# Altium PCB NXP_RFID - Team Colab.PcbDoc
Units mm, origin at the board's own origin, x right, y up, seen from the top; angles counter-clockwise.
Board outline 127 x 68.7 mm, 2 copper layers (Top Layer, Bottom Layer), stack 1.57 mm thick; 78 components, 60 nets, 220 pads, 53 vias.
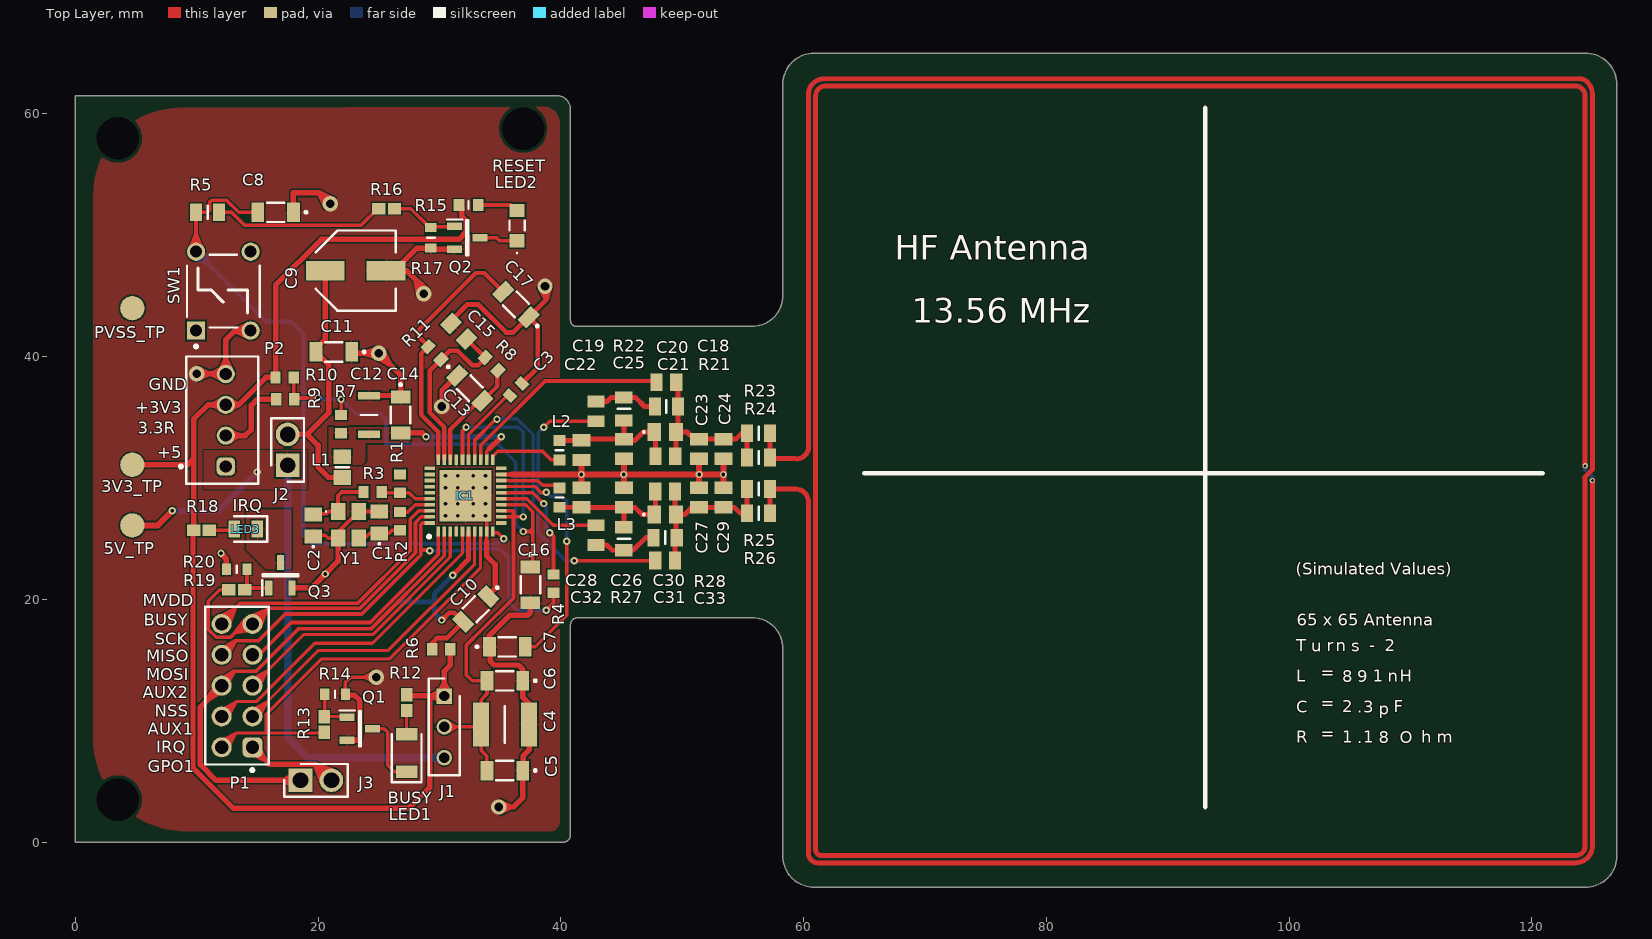
[diagram p0: Top Layer view]
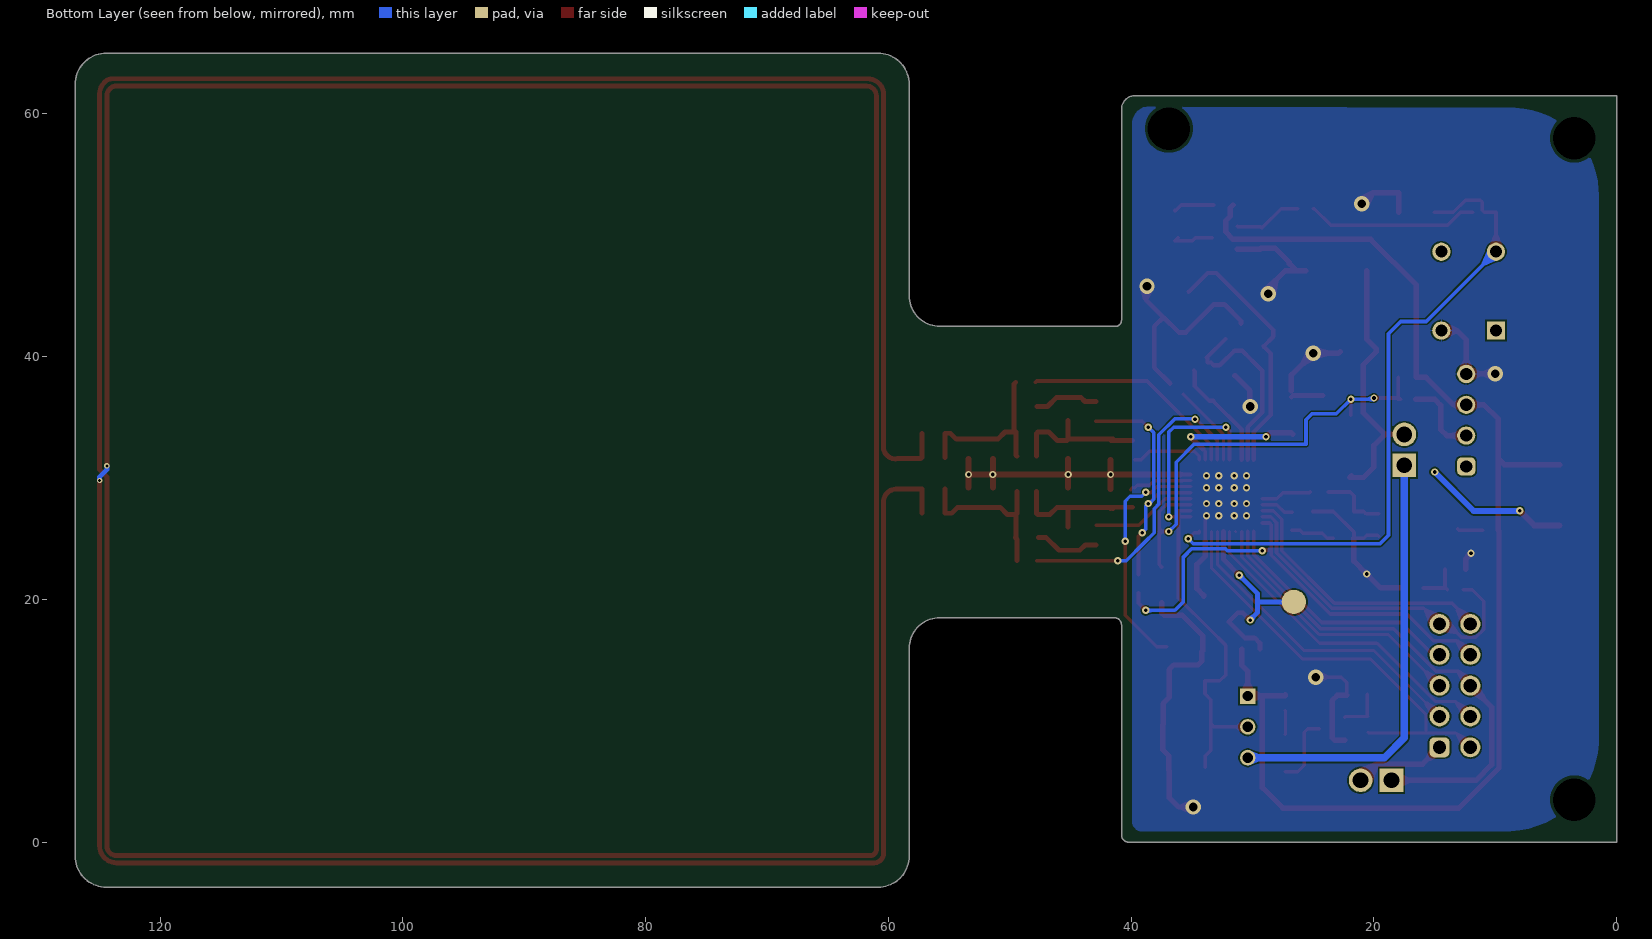
[diagram p1: Bottom Layer view, seen from below]
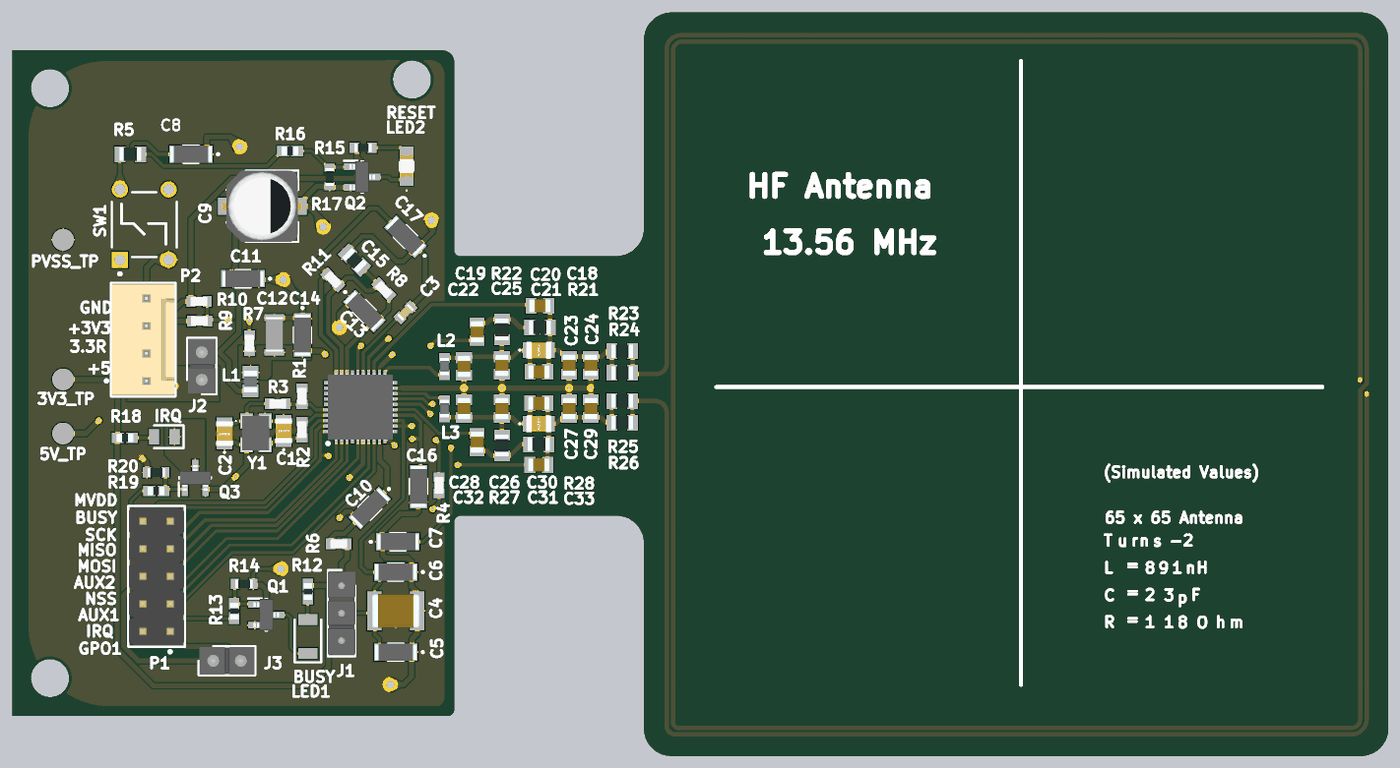
[diagram p2: 3D render of the assembled board from above, using the file's embedded part models]

## Layer stack, top to bottom
Top Solder: solder mask 0.0127, Solder Resist, Dk 3.8
Top Layer: signal copper 0.035
Dielectric: core 1.5, FR-4, Dk 4.5
Bottom Layer: signal copper 0.035
Bottom Solder: solder mask 0.0127, Solder Resist, Dk 3.8

## Board outline
39.7,61.5 cw(c39.7,60.4) 40.8,60.4 40.8,43 ccw(c41.3,43) 41.3,42.5 55.76,42.5 ccw(c55.76,45.04) 58.3,45.04 58.3,62.46 cw(c60.84,62.46) 60.84,65 124.46,65 cw(c124.46,62.46) 127,62.46 127,-1.16 cw(c124.46,-1.16) 124.46,-3.7 60.84,-3.7 cw(c60.84,-1.16) 58.3,-1.16 58.3,15.96 ccw(c55.76,15.96) 55.76,18.5 41.4,18.5 ccw(c41.4,17.9) 40.8,17.9 40.8,0.6 cw(c40.2,0.6) 40.2,0 0,0 0,61.5

## Design rules (kind name [scope] priority, off if disabled: settings)
BoardOutlineClearance [All] p1: gap=0.2 ignorepadtopadclearanceinfootprint=FALSE
Clearance [All] p1: gap=0.127 ignorepadtopadclearanceinfootprint=FALSE except(0.25: Arc-Hole Track-Hole SMDPad-Hole THPad-Hole Via-Hole Fill-Hole Poly-Hole Region-Hole Text-Hole)
ComponentClearance [All] p1: gap=0.127 collisioncheckmode=3 verticalgap=0.127 showdistances=TRUE
DiffPairsRouting [All] p1: maxlimit=0.254 minlimit=0.127 mostfreqgap=0.127 toplayer_minwidth=0.127 toplayer_maxwidth=25.4 toplayer_prefwidth=0.127 bottomlayer_minwidth=0.127 bottomlayer_maxwidth=25.4 bottomlayer_prefwidth=0.127 maxuncoupledlength=12.7
Height [All] p1: minheight=0 maxheight=1816.048 prefheight=12.7
HoleSize [All] p1: absolutevalues=TRUE maxlimit=6.3 minlimit=0.2 maxpercent=80.000 minpercent=20.000
HoleToHoleClearance [All] p1: gap=0.25 allowstackedmicrovias=FALSE
MinimumAnnularRing [All] p1: minimumring=0.076
MinimumSolderMaskSliver [All] p1: minsoldermaskwidth=0
PlaneClearance [All] p1: clearance=0.127
PlaneConnect PlaneConnectPowerPads [InPadClass('PowerPads')] p1: planeconnectstyle=Direct reliefexpansion=0.508 reliefentries=4 reliefconductorwidth=0.254 reliefairgap=0.254
PlaneConnect [All] p2: pad.planeconnectstyle=Relief pad.reliefexpansion=0.3 pad.reliefentries=4 pad.reliefconductorwidth=0.127 pad.reliefairgap=0.127 via.planeconnectstyle=Direct via.reliefexpansion=0.3 via.reliefentries=4 via.reliefconductorwidth=0.127 via.reliefairgap=0.127
PolygonConnect PolygonConnectPowerPads [All vs (InPadClass('PowerPads'))] p1: connectstyle=Direct reliefconductorwidth=0.254 reliefentries=4 polygonreliefangle="90 Angle" airgapwidth=0.254
PolygonConnect [All] p2: thpad.connectstyle=Relief thpad.reliefconductorwidth=0.127 thpad.reliefentries=4 thpad.polygonreliefangle="90 Angle" thpad.airgapwidth=0.127 smdpad.connectstyle=Relief smdpad.reliefconductorwidth=0.127 smdpad.reliefentries=4 smdpad.polygonreliefangle="90 Angle" smdpad.airgapwidth=0.127 via.connectstyle=Direct via.reliefconductorwidth=0.127 via.reliefentries=4 via.polygonreliefangle="90 Angle" via.airgapwidth=0.127
RoutingVias [All] p1: holewidth=0.3 width=0.6 viastyle="Through Hole" minholewidth=0.2 minwidth=0.2 maxholewidth=0.6 maxwidth=6.6
SilkToSilkClearance [All] p1: silktosilkclearance=0
SilkToSolderMaskClearance [IsPad] p1: minsilkscreentomaskgap=0.125 clearancetoexposedcopper=TRUE
SolderMaskExpansion [All] p1: expansion=0.075 istentingtop=FALSE
SupplyNets "Schematic Supply Nets_3" [InNet('+3V3REG')] p1: voltage=0.000
SupplyNets "Schematic Supply Nets_2" [InNet('+5')] p2: voltage=0.000
SupplyNets "Schematic Supply Nets_1" [InNet('PVSS')] p3: voltage=0.000
SupplyNets "Schematic Supply Nets" [InNet('+3V3')] p4: voltage=0.000
UnRoutedNet [All] p1: checkbadconnections=TRUE
Width [All] p1: maxlimit=25.4 minlimit=0.127 preferedwidth=0.27 minimp=50.000000 maximp=50.000000 favimp=50.000000
19 further rules are at their usual default settings.

## Classes and differential pairs
component class Designator: C1 C2 C3 C4 C5 C6 C7 C8 C9 C10 C11 C12 C13 C14 C15 C16 C17 IC1 J1 J2 J3 L1 R1 R2 R3 R4 R5 R6 R7 R8 R9 R10 R11 SW1 Y1

## Components (designator, comment, footprint, x,y, rotation, side; value= is the part's Value field where it differs from the comment)
C1 "15 pF ±1% 50V" C0805 25.05,26.35 r90 top
C2 "15 pF ±1% 50V" C0805 19.6,26.1 r90 top
C3 "0.47 µF ±5% 25V" CAPC1608X90N 36.3,37.3 r45 top
C4 "4.7 µF ±5% 50V" CAPC4532X279N 35.4,9.7 r180 top
C5 "0.1 µF ±1% 50V" GRT31x 35.4,5.9 r180 top
C6 "0.1 µF ±1% 50V" GRT31x 35.4,13.3 r180 top
C7 "0.1 µF ±1% 50V" GRT31x 35.6,16.1 r0 top
C8 "0.1 µF ±1% 50V" GRT31x 16.5,51.9 r180 top
C9 "100µF 25V" EEHZA1E101XP 23.1,47.1 r0 top
C10 "0.1 µF ±1% 50V" GRT31x 33,19.2 r225 top
C11 "0.1 µF ±1% 50V" GRT31x 21.3,40.4 r180 top
C12 "6.8 µF ±10% 50V" CAPC3216X180N 24.2,35.2 r270 top
C13 "0.1 µF ±1% 50V" GRT31x 32.5,37.4 r315 top
C14 "0.1 µF ±1% 50V" GRT31x 26.8,35.2 r270 top
C15 "1 µF ±5% 50V" RESC2012X140N 31.6,42.1 r315 top
C16 "0.1 µF ±1% 50V" GRT31x 37.5,21.2 r270 top
C17 "0.1 µF ±1% 50V" GRT31x 36.3,44.3 r135 top
C18 "82 pF ±1% 50V" CAPC2012X94N_1 48.7,37.9 r0 top
C19 "1 nF ±1% 50V" CAPC2012X90N 42.9,35.5 r90 top
C20 "15 pF ±1% 50V" C0805 48.6,33.8 r0 top
C21 "18 pF ±1% 50V" CAPC2012X94N_2 48.61,31.8 r0 top
C22 "220 pF ±1% 50V" CAPC2012X94N_3 41.7,32.3 r90 top
C23 "120 pF 50V" CAPC2012X94N_5 51.4,32.4 r90 top
C24 "82 pF ±1% 50V" CAPC2012X94N_1 53.4,32.4 r90 top
C25 "33 pF ±1% 100V" CAPC2012X94N_4 45.2,32.39 r90 top
C26 "33 pF ±1% 100V" CAPC2012X94N_4 45.2,28.4 r90 top
C27 "120 pF 50V" CAPC2012X94N_5 51.4,28.4 r90 top
C28 "220 pF ±1% 50V" CAPC2012X94N_3 41.7,28.4 r90 top
C29 "82 pF ±1% 50V" CAPC2012X94N_1 53.4,28.4 r90 top
C30 "18 pF ±1% 50V" CAPC2012X94N_2 48.6,28.9 r0 top
C31 "15 pF ±1% 50V" C0805 48.6,27 r0 top
C32 "1 nF ±1% 50V" CAPC2012X90N 42.9,25.3 r270 top
C33 "82 pF ±1% 50V" CAPC2012X94N_1 48.6,23.2 r0 top
IC1 "PN5180A0HN_C3Y" QFN50P600X600X100-41N-D 32.15,28.55 r90 top
J1 "3pin header" HDRV3W64P0X254_1X3_762X254X864P 30.4,12.04 r270 top
J2 "2pin header" HDRV2W110P0X254_1X2_508X254X854P 17.5,31.06 r90 top
J3 "2pin header" HDRV2W110P0X254_1X2_508X254X854P 18.56,5.1 r0 top
L1 "22 nH" INDC2012X115N 22,30.9 r90 top
L2 "470 nH" INDC1608X95N 39.9,32.3 r90 top
L3 "470 nH" INDC1608X95N 39.9,28.4 r270 top
LED1 "LED_orange" LEDC3216X120N 27.3,7.35 r90 top
LED2 "LED_yellow" LTSTC171KSKT 36.4,50.8 r90 top
LED3 "LED_green" LEDC2012X90N 14.05,25.8 r180 top
P1 "61301021121" 61301021121 13.33,12.9 r90 top locked
P2 "61900411121" 61900411121 12.1,34.77 r270 top
Q1 "BC817" SOT96P237X111-3N 23.45,9.345 r0 top
Q2 "BC817" SOT96P237X111-3N 32.3,49.8 r0 top
Q3 "BC817" SOT96P237X111-3N 16.9,22 r90 top
R1 "D.N.P." RESC1608X50N_DNP 26.75,29.55 r90 top
R2 "0R  0.33W" RESC1608X50N_1 26.75,26.45 r90 top
R3 "0R  0.33W" RESC1608X50N_1 24.5,28.85 r0 top
R4 "D.N.P." RESC1608X50N_DNP 39.4,21.3 r90 top
R5 "2k7 0.5W" RESC2012X60N 10.9,51.9 r180 top
R6 "0R  0.33W" RESC1608X50N_1 30.15,15.9 r180 top
R7 "D.N.P." RESC1608X50N_DNP 21.9,34.45 r270 top
R8 "0R  0.33W" RESC1608X50N_1 34.3,39.4 r315 top
R9 "D.N.P." RESC1608X50N_DNP 17.3,36.5 r180 top
R10 "D.N.P." RESC1608X50N_DNP 17.25,38.3 r180 top
R11 "0R  0.33W" RESC1608X50N_1 29.6,40.3 r135 top
R12 "1k 0.5W" RESC1608X58N 27.3,11.5 r270 top
R13 "1k 0.5W" RESC1608X58N 20.5,9.7 r270 top
R14 "4k7 0.4W" RESC1608X55N_1 21.4,12.2 r180 top
R15 "470Ohm" RESC1608X55N 32.4,52.5 r0 top
R16 "1k 0.5W" RESC1608X58N 25.65,52.2 r180 top
R17 "4k7 0.4W" RESC1608X55N_1 29.3,49.8 r90 top
R18 "1k 0.5W" RESC1608X58N 10.4,25.7 r0 top
R19 "1k 0.5W" RESC1608X58N 13.3,20.8 r180 top
R20 "4k7 0.4W" RESC1608X55N_1 13.3,22.5 r0 top
R21 "D.N.P" RESC2012X60N_1 48.7,35.9 r180 top
R22 "4k7 0.5W" RESC2012X60N_1 45.2,35.7 r90 top
R23 "2R2 0.5W" RESC2012X60N_2 56.3,33.7 r0 top
R24 "2R2 0.5W" RESC2012X60N_2 56.3,31.7 r0 top
R25 "2R2 0.5W" RESC2012X60N_2 56.3,29.1 r0 top
R26 "2R2 0.5W" RESC2012X60N_2 56.3,27.1 r0 top
R27 "4k7 0.5W" RESC2012X60N_1 45.2,25 r90 top
R28 "D.N.P" RESC2012X60N_1 48.6,25.1 r180 top
SW1 "push_button" TECO-1825910-6_V 12.2,45.4 r90 top
Y1 "27.12MHz" 7M27120MEEQT 22.5,26.15 r270 top

## Footprints (in the part's own frame and the unit in brackets; to place one, negate y for a bottom-side part, rotate by r counter-clockwise, add the part's x,y. Pads: shape width x height; smd on the part's side, far side on the other; paste and mask are expansions set on the pad)
7M27120MEEQT [mm]
  rect 1.4x1.2 smd: 1(-1.1,-0.85) 2(1.1,-0.85) 3(1.1,0.85) 4(-1.1,0.85)
  silkscreen extent -1.15,-1.9 -1.05,-1.8, body extent -1.68,-1.33 1.68,1.33, height 0.9
61301021121 [mm] "Pin Header, pitch 2.54 mm, THT, Vertical, dual row, 10p"
  rrect50% 1.65x1.65 hole 1.1: 1(-5.08,-1.27)
  round 1.65 hole 1.1: 2(-5.08,1.27) 3(-2.54,-1.27) 4(-2.54,1.27) 5(0,-1.27) 6(0,1.27) 7(2.54,-1.27) 8(2.54,1.27) 9(5.08,-1.27) 10(5.08,1.27)
  silkscreen extent -7.08,-2.61 6.5,2.61, body extent -6.35,-2.54 6.35,2.54, height 8.59
61900411121 [mm] "2.54mm Male Locking Header, 4p"
  rrect50% 1.5x1.5 hole 1: 1(3.81,0.3)
  round 1.5 hole 1: 2(1.27,0.3) 3(-1.27,0.3) 4(-3.81,0.3)
  silkscreen extent -5.25,-3.52 5.25,2.97, body extent -5.08,-2.9 5.08,2.9, height 11.53
C0805 [mm]
  rect 1.15x1.45 smd: 1(-0.9,0) 2(0.9,0)
  silkscreen extent -1.8,-0.05 -1.7,0.05, body extent -1.15,-0.78 1.15,0.77, height 0.98
CAPC1608X90N [mm]
  rect 0.78x0.99 smd: 1(-0.7,0) 2(0.7,0)
  body extent -0.76,-0.38 0.76,0.38, height 0.91
CAPC2012X90N [mm]
  rect 0.96x1.39 smd: 1(-0.81,0) 2(0.81,0)
  body extent -1,-0.63 1,0.63, height 0.9
CAPC2012X94N_1 [mm]
  rect 1.02x1.47 smd: 1(-0.81,0) 2(0.81,0)
  body extent -1,-0.63 1,0.63, height 0.94
CAPC2012X94N_2 [mm]
  rect 1.02x1.47 smd: 1(-0.81,0) 2(0.81,0)
  body extent -1,-0.63 1,0.63, height 0.94
CAPC2012X94N_3 [mm]
  rect 1.02x1.47 smd: 1(-0.81,0) 2(0.81,0)
  body extent -1,-0.63 1,0.63, height 0.94
CAPC2012X94N_4 [mm]
  rect 1.02x1.47 smd: 1(-0.81,0) 2(0.81,0)
  body extent -1,-0.63 1,0.63, height 0.94
CAPC2012X94N_5 [mm]
  rect 1.02x1.47 smd: 1(-0.81,0) 2(0.81,0)
  body extent -1,-0.63 1,0.63, height 0.94
CAPC3216X180N [mm]
  rect 0.62x1.82 smd: 1(-1.6,0) 2(1.6,0)
  silkscreen extent 0,-0.7 0,0.7, body extent -1.65,-0.8 1.55,0.8, height 1.6
CAPC4532X279N [mm]
  rect 1.34x3.61 smd: 1(-1.98,0) 2(1.98,0)
  silkscreen extent 0,-1.5 0,1.5, body extent -2.25,-1.6 2.25,1.6, height 2.79
EEHZA1E101XP [mm]
  rect 3.2x1.6 smd: 1(-2.5,0) 2(2.5,0)
  silkscreen extent -4.88,-3.3 3.3,3.3, body extent -3.68,-3.3 3.62,3.3, height 5.8
GRT31x [mm]
  rect 1.05x1.6 smd: 1(-1.475,0) 2(1.475,0)
  silkscreen extent -2.6,-0.8 0.7,0.8, body extent -1.9,-0.8 1.9,0.8, height 1.35
HDRV2W110P0X254_1X2_508X254X854P [mm]
  rect 1.95x1.95 hole 1.3: 1(0,0)
  round 1.95 hole 1.3: 2(2.54,0)
  silkscreen extent -1.34,-1.35 3.89,1.34, body extent -1.27,-1.27 3.81,1.27, height 8.54
HDRV3W64P0X254_1X3_762X254X864P [mm]
  rect 1.275x1.275 hole 0.85: 1(0,0)
  round 1.275 hole 0.85: 2(2.54,0) 3(5.08,0)
  silkscreen extent -1.44,-1.27 6.53,1.27, body extent -1.27,-1.27 6.35,1.27, height 8.64
INDC1608X95N [mm]
  rect 0.9x1 smd: 1(-0.8,0) 2(0.8,0)
  silkscreen extent 0,-0.3 0,0.3, body extent -0.8,-0.4 0.8,0.4, height 0.95
INDC2012X115N [mm]
  rect 1.2x1.45 smd: 1(-0.85,0) 2(0.85,0)
  silkscreen extent 0,-0.53 0,0.53, body extent -1,-0.63 1,0.63, height 1.15
LEDC2012X90N [mm]
  rect 0.95x1.4 smd: 1(-0.95,0) 2(0.95,0)
  silkscreen extent -1.77,-1.05 0.95,1.05
LEDC3216X120N [mm]
  rect 1x1.75 smd: 1(-1.55,0) 2(1.55,0)
  silkscreen extent -2.4,-1.23 1.55,1.22
LTSTC171KSKT [mm]
  rect 1.1x1.25 smd: 1(-1.25,0) 2(1.25,0)
  silkscreen extent -2.3,-0.63 0.4,0.62, body extent -1,-0.63 1,0.63, height 0.79
QFN50P600X600X100-41N-D [mm]
  rect 0.85x0.3 smd: 1(-2.95,2.25) 2(-2.95,1.75) 3(-2.95,1.25) 4(-2.95,0.75) 5(-2.95,0.25) 6(-2.95,-0.25) 7(-2.95,-0.75) 8(-2.95,-1.25) 9(-2.95,-1.75) 10(-2.95,-2.25) 21(2.95,-2.25) 22(2.95,-1.75) 23(2.95,-1.25) 24(2.95,-0.75) 25(2.95,-0.25) 26(2.95,0.25) 27(2.95,0.75) 28(2.95,1.25) 29(2.95,1.75) 30(2.95,2.25)
  rect 0.3x0.85 smd: 11(-2.25,-2.95) 12(-1.75,-2.95) 13(-1.25,-2.95) 14(-0.75,-2.95) 15(-0.25,-2.95) 16(0.25,-2.95) 17(0.75,-2.95) 18(1.25,-2.95) 19(1.75,-2.95) 20(2.25,-2.95) 31(2.25,2.95) 32(1.75,2.95) 33(1.25,2.95) 34(0.75,2.95) 35(0.25,2.95) 36(-0.25,2.95) 37(-0.75,2.95) 38(-1.25,2.95) 39(-1.75,2.95) 40(-2.25,2.95)
  rect 4.25x4.25 smd: 41(0,0)
  silkscreen extent -3.5,2.87 -3.25,3.12, body extent -3.05,-3.05 3.05,3.05, height 1
RESC1608X50N_1 [mm]
  rect 0.85x1 smd: 1(-0.75,0) 2(0.75,0)
  body extent -0.77,-0.43 0.78,0.42, height 0.45
RESC1608X50N_DNP [mm]
  rect 0.85x1 smd: 1(-0.75,0) 2(0.75,0)
  body extent -0.77,-0.43 0.78,0.42, height 0.45
RESC1608X55N [mm]
  rect 0.9x0.95 smd: 1(-0.8,0) 2(0.8,0)
  silkscreen extent 0,-0.3 0,0.3, body extent -0.8,-0.4 0.8,0.4, height 0.55
RESC1608X55N_1 [mm]
  rect 0.75x0.95 smd: 1(-0.85,0) 2(0.85,0)
  silkscreen extent 0,-0.3 0,0.3, body extent -0.8,-0.4 0.8,0.4, height 0.55
RESC1608X58N [mm]
  rect 1.1x0.95 smd: 1(-0.65,0) 2(0.65,0)
  body extent -0.77,-0.4 0.77,0.4, height 0.58
RESC2012X60N [mm]
  rect 1x1.45 smd: 1(-0.95,0) 2(0.95,0)
  silkscreen extent 0,-0.53 0,0.53, body extent -1,-0.63 1,0.63, height 0.6
RESC2012X60N_1 [mm]
  rect 1x1.45 smd: 1(-0.95,0) 2(0.95,0)
  silkscreen extent 0,-0.53 0,0.52, body extent -1,-0.63 1,0.63, height 0.6
RESC2012X60N_2 [mm]
  rect 1x1.45 smd: 1(-0.95,0) 2(0.95,0)
  silkscreen extent 0,-0.53 0,0.53, body extent -1,-0.63 1,0.63, height 0.6
RESC2012X140N [mm]
  rect 1.15x1.45 smd: 1(-0.9,0) 2(0.9,0)
  body extent -1,-0.63 1,0.63, height 1.4
SOT96P237X111-3N [mm]
  rect 1.25x0.6 smd: 1(-1.05,0.955) 2(-1.05,-0.955) 3(1.05,0)
  silkscreen extent -1.67,-1.46 0.08,1.5, body extent -1.18,-1.46 1.18,1.46, height 1.11
TECO-1825910-6_V [mm] "Switch, 4-Leads, Body 5.99x5.99mm"
  rect 1.5x1.5 hole 0.99: 1(-3.25,2.25)
  round 1.5 hole 0.99: 2(3.25,2.25) 3(-3.25,-2.25) 4(3.25,-2.25)
  silkscreen extent -4.67,-3 3,3, body extent -3,-2.99 2.99,3, height 5

## Part data
C1 C2 C20 C31: library part 15pF, "15 pF ±1% 50V Ceramic Capacitor C0G, NP0 0805 (2012 Metric)", Manufacturer_Name=KEMET, Manufacturer_Part_Number=C0805C150F5GACTU, Mouser Part Number=80-C0805C150F5GACTU, Datasheet Link=https://content.kemet.com/datasheets/KEM_C1003_C0G_SMD.pdf, Height=1.1mm, Mouser Price/Stock=https://www.mouser.com/Search/Refine.aspx?Keyword=80-C0805C150F5GACTU
C3: library part 470nF, "0.47 µF ±5% 25V Ceramic Capacitor X7R 0603 (1608 Metric)", Manufacturer_Name="Kyocera AVX", Manufacturer_Part_Number=06033C474JAT2A, Mouser Part Number=581-06033C474JAT2A, Datasheet Link=https://componentsearchengine.com/Datasheets/1/06031A100FAT2A.pdf, Height=0.9mm, Mouser Price/Stock=https://www.mouser.com/Search/Refine.aspx?Keyword=581-06033C474JAT2A
C4: library part 4.7uF, "4.7 µF ±5% 50V Ceramic Capacitor X7R 1812 (4532 Metric)", Arrow Part Number=18125C475JAT2A, Manufacturer_Name="Kyocera AVX", Mouser Part Number=581-18125C475JAT2A, Arrow Price/Stock=https://www.arrow.com/en/products/18125c475jat2a/avx, Datasheet Link=https://datasheets.kyocera-avx.com/X7RDielectric.pdf, Height=2.79mm, Manufacturer_Part_Number=18125C475JAT2A, Mouser Price/Stock=https://www.mouser.com/Search/Refine.aspx?Keyword=581-18125C475JAT2A
C5 C6 C7 C8 C10 C11 C13 C14 C16 C17: library part 100nF, "0.1 µF ±1% 50V Ceramic Capacitor C0G, NP0 1206 (3216 Metric)", Arrow Part Number=GRT31C5C1H104FA02L, Manufacturer_Name="Murata Electronics", Mouser Part Number=81-GRT31C5C1H104FA2L, Arrow Price/Stock=https://www.arrow.com/en/products/grt31c5c1h104fa02l/murata-manufacturing?region=nac, Datasheet Link=https://search.murata.co.jp/Ceramy/image/img/A01X/G101/ENG/GRT31C5C1H104FA02-01A.pdf, Height=1.25mm, Manufacturer_Part_Number=GRT31C5C1H104FA02L, Mouser Price/Stock=https://www.mouser.co.uk/ProductDetail/Murata-Electronics/GRT31C5C1H104FA02L?qs=xZ%2FP%252Ba9zWqakAIIZeEzSxA%3D%3D
C9: library part 100µF, "Capacitor Polarised. Aluminum Organic Polymer Capacitors 100uF 25volt AEC-Q200", Manufacturer_Name=Panasonic, Manufacturer_Part_Number=EEH-ZA1E101XP, Mouser Part Number=667-EEH-ZA1E101XP, Datasheet Link=http://industrial.panasonic.com/cdbs/www-data/pdf/RDD0000/ABA0000C1221.pdf, Height=8.3mm, Mouser Price/Stock=https://www.mouser.co.uk/ProductDetail/Panasonic/EEH-ZA1E101XP?qs=7UCyOFMWVHbBL6OBgRrCPQ%3D%3D
C12: library part 6.8uF, "6.8 µF ±10% 50V Ceramic Capacitor X5R 1206 (3216 Metric)", Arrow Part Number=C3216X5R1H685K160AB, Manufacturer_Name=TDK, Mouser Part Number=810-C3216X5R1H685K, Arrow Price/Stock=https://www.arrow.com/en/products/c3216x5r1h685k160ab/tdk, Datasheet Link=https://product.tdk.com/info/en/catalog/datasheets/mlcc_commercial_midvoltage_en.pdf, Height=1.8mm, Manufacturer_Part_Number=C3216X5R1H685K160AB, Mouser Price/Stock=https://www.mouser.co.uk/ProductDetail/TDK/C3216X5R1H685K160AB?qs=LcTL%2F5vFEzHV52DL6DPbFg%3D%3D
C15: library part 1uF, "1 µF ±5% 50V Ceramic Capacitor X7R 0805 (2012 Metric)", Arrow Part Number=08055C105JAT2A, Manufacturer_Name="Kyocera AVX", Mouser Part Number=581-08055C105JAT2A, Arrow Price/Stock=https://www.arrow.com/en/products/08055c105jat2a/avx, Datasheet Link=https://componentsearchengine.com/Datasheets/1/08055C105JAT2A.pdf, Height=1.4mm, Manufacturer_Part_Number=08055C105JAT2A, Mouser Price/Stock=https://www.mouser.co.uk/ProductDetail/KYOCERA-AVX/08055C105JAT2A?qs=tIBUQlZETBw4JiKO8J7C1w%3D%3D
C18 C24 C29 C33: library part 82pF, "82 pF ±1% 50V Ceramic Capacitor C0G, NP0 0805 (2012 Metric)", Manufacturer_Name="Kyocera AVX", Manufacturer_Part_Number=08055A820FAT2A, Mouser Part Number=581-08055A820FAT2A, Datasheet Link=https://www.mouser.com/datasheet/2/40/C0GNP0_Dielectric-951274.pdf, Height=0.94mm, Mouser Price/Stock=https://www.mouser.co.uk/ProductDetail/Kyocera-AVX/08055A820FAT2A?qs=PcWMbIuZCscXY%2FuloG0yJQ%3D%3D
C19 C32: library part 1nF, "1 nF ±1% 50V Ceramic Capacitor C0G, NP0 0805 (2012 Metric)", Arrow Part Number=VJ0805A102FXACW1BC, Manufacturer_Name=Vishay, Mouser Part Number=77-VJ0805A102FXACBC, Arrow Price/Stock=https://www.arrow.com/en/products/vj0805a102fxacw1bc/vishay, Datasheet Link=https://www.arrow.com/en/products/vj0805a102fxacw1bc/vishay, Height=0.9mm, Manufacturer_Part_Number=VJ0805A102FXACW1BC, Mouser Price/Stock=https://www.mouser.com/Search/Refine.aspx?Keyword=77-VJ0805A102FXACBC
C21 C30: library part 18pF, "18 pF ±1% 50V Ceramic Capacitor C0G, NP0 0805 (2012 Metric)", Manufacturer_Name="Kyocera AVX", Manufacturer_Part_Number=08055A180FAT2A, Mouser Part Number=581-08055A180FAT2A, Datasheet Link=https://4donline.ihs.com/images/VipMasterIC/IC/AVXC/AVXC-S-A0014478390/AVXC-S-A0014712186-1.pdf?hkey=EF798316E3902B6ED9A73243A3159BB0, Height=0.94mm, Mouser Price/Stock=https://www.mouser.com/Search/Refine.aspx?Keyword=581-08055A180FAT2A
C22 C28: library part 220pF, "220 pF ±1% 50V Ceramic Capacitor C0G, NP0 0805 (2012 Metric)", Manufacturer_Name="Kyocera AVX", Manufacturer_Part_Number=08055A221FAT2A, Mouser Part Number=581-08055A221FAT2A, Datasheet Link=https://www.mouser.com/datasheet/2/40/C0GNP0_Dielectric-951274.pdf, Height=0.94mm, Mouser Price/Stock=https://www.mouser.co.uk/ProductDetail/AVX/08055A221FAT2A?qs=owscpGBW86VBfJF%2FIHQR%252BQ%3D%3D
C23 C27: library part 120pF, "120 pF ±1% 50V Ceramic Capacitor C0G, NP0 0805 (2012 Metric)", Manufacturer_Name="Kyocera AVX", Manufacturer_Part_Number=08055A121FAT2A, Mouser Part Number=581-08055A121F, Datasheet Link=https://componentsearchengine.com/Datasheets/1/08055A121FAT2A.pdf, Height=0.94mm, Mouser Price/Stock=https://www.mouser.com/Search/Refine.aspx?Keyword=581-08055A121F
C25 C26: library part 33pF, "33 pF ±1% 100V Ceramic Capacitor C0G, NP0 0805 (2012 Metric)", Arrow Part Number=08051A330FAT2A, Manufacturer_Name="Kyocera AVX", Mouser Part Number=581-08051A330F, Arrow Price/Stock=https://www.arrow.com/en/products/08051a330fat2a/avx, Datasheet Link=https://spicat.kyocera-avx.com/product/mlcc/chartview/08051A330FAT2A/DataSheet/NP0c, Height=0.94mm, Manufacturer_Part_Number=08051A330FAT2A, Mouser Price/Stock=https://www.mouser.co.uk/ProductDetail/AVX/08051A330FAT2A?qs=xS%252BL8w1%252B7NBUjm7pwPIlOg%3D%3D
IC1: "RF Front End High-Performance Multi-protocol Full NFC Forum-compliant Frontend PN5180A0HN/C3Y", Arrow Part Number=PN5180A0HN/C3Y, Manufacturer_Name=NXP, Mouser Part Number=771-PN5180A0HN/C3Y, Arrow Price/Stock=https://www.arrow.com/en/products/pn5180a0hnc3y/nxp-semiconductors?utm_currency=USD&region=nac, Datasheet Link=https://datasheet.datasheetarchive.com/originals/distributors/DKDS-31/606841.pdf, Height=1mm, Manufacturer_Part_Number=PN5180A0HN/C3Y, Mouser Price/Stock=https://www.mouser.co.uk/ProductDetail/NXP-Semiconductors/PN5180A0HN-C3Y?qs=1mbolxNpo8fIXIFwLHRV2A%3D%3D
J1: "Connector Header Through Hole 3 position 0.100\" (2.54mm)", Manufacturer_Name=Harwin, Manufacturer_Part_Number=M20-9990345, Mouser Part Number=855-M20-9990345, Datasheet Link=https://cdn.harwin.com/pdfs/M20-999.pdf, Height=8.64mm, Mouser Price/Stock=https://www.mouser.co.uk/ProductDetail/Harwin/M20-9990345?qs=ulE8k0yEMYbl6ZPCtNdmpA%3D%3D
J2 J3: "Connector Header Through Hole 2 position 0.100\" (2.54mm)", Manufacturer_Name="Wurth Elektronik", Manufacturer_Part_Number=61300211121, Mouser Part Number=710-61300211121, Datasheet Link=https://componentsearchengine.com/Datasheets/2/61300211121.pdf, Height=8.54mm, Mouser Price/Stock=https://www.mouser.co.uk/ProductDetail/Wurth-Elektronik/61300211121?qs=t4813l51qx%252B1A5GYDQxPlw%3D%3D
L1: library part 22nH, "22 nH Unshielded Multilayer Inductor 300 mA 500mOhm Max 0805 (2012 Metric)", Arrow Part Number=AIMC-0805-22NJ-T, Manufacturer_Name=ABRACON, Mouser Part Number=815-AIMC-0805-22NJT, Arrow Price/Stock=https://www.arrow.com/en/products/aimc-0805-22nj-t/abracon, Datasheet Link=https://abracon.com/Magnetics/new/AIMC-0805.pdf, Height=1.15mm, Manufacturer_Part_Number=AIMC-0805-22NJ-T, Mouser Price/Stock=https://www.mouser.com/Search/Refine.aspx?Keyword=815-AIMC-0805-22NJT
L2 L3: library part 470nH, "470 nH Shielded Multilayer Inductor 400 mA 494mOhm Max 0603 (1608 Metric)", Arrow Part Number=MLJ1608WR47JT000, Manufacturer_Name=TDK, Mouser Part Number=810-MLJ1608WR47JT000, Arrow Price/Stock=https://www.arrow.com/en/products/mlj1608wr47jt000/tdk?region=nac, Datasheet Link=https://product.tdk.com/system/files/dam/doc/product/inductor/inductor/smd/catalog/inductor_commercial_standard_mlj1608_en.pdf, Height=0.95mm, Manufacturer_Part_Number=MLJ1608WR47JT000, Mouser Price/Stock=https://www.mouser.co.uk/ProductDetail/TDK/MLJ1608WR47JT000?qs=XFe3dyCRgQg9kpQbVd6YyA%3D%3D
LED1: "LED", Arrow Part Number=LTST-C150KAKT, Manufacturer_Name=Lite-On, Mouser Part Number=859-LTST-C150KAKT, Arrow Price/Stock=https://www.arrow.com/en/products/ltst-c150kakt/lite-on-technology?region=nac, Datasheet Link=http://media.digikey.com/pdf/Data%20Sheets/Lite-On%20PDFs/LTST-C150KAKT.pdf, Height=1.2mm, Manufacturer_Part_Number=LTST-C150KAKT, Mouser Price/Stock=https://www.mouser.co.uk/ProductDetail/Lite-On/LTST-C150KAKT?qs=Z3CaLxJiOJI8YYCkdyNq2A%3D%3D
LED2: "LED", Arrow Part Number=LTST-C171KSKT, Manufacturer_Name=Lite-On, Mouser Part Number=859-LTST-C171KSKT, Arrow Price/Stock=https://www.arrow.com/en/products/ltst-c171kskt/lite-on-technology?utm_currency=USD&region=nac, Datasheet Link=https://optoelectronics.liteon.com/upload/download/DS22-2000-110/LTST-C171KSKT.pdf, Height=0.9mm, Manufacturer_Part_Number=LTST-C171KSKT, Mouser Price/Stock=https://www.mouser.co.uk/ProductDetail/LITEON/LTST-C171KSKT?qs=llMtm9xcdM0CwR1bByTaUQ%3D%3D
LED3: "LED", Arrow Part Number=LTST-C171KGKT, Manufacturer_Name=Lite-On, Mouser Part Number=859-LTST-C171KGKT, Arrow Price/Stock=https://www.arrow.com/en/products/ltst-c171kgkt/lite-on-technology?region=nac, Datasheet Link=https://optoelectronics.liteon.com/upload/download/DS22-2000-118/LTST-C171KGKT.pdf, Height=0.9mm, Manufacturer_Part_Number=LTST-C171KGKT, Mouser Price/Stock=https://www.mouser.co.uk/ProductDetail/LITEON/LTST-C171KGKT?qs=j1zysehuyChA38z%2F%252BFfUSw%3D%3D
P1: library part CMP-1502-01084-3, Color=Black, Contact Resistance=20mΩ, Current Rating=3A, Flammability Rating="UL94 V-0", Insulation Resistance=1GΩ, Max Operating Temperature=105°C, Min Operating Temperature=-40°C, Operating Supply Voltage=250V, Connector Type="Male Pin", Contact Gender=Male, Contact Material=Copper, Contact Mating Length=5.9944mm, Contact Plating=Gold, Gender=Male, Height=2.54mm, Housing Material=PBT, Insulation=Insulated, Lead Pitch=2.54mm, Length=12.7mm, Mount="Through Hole", NexarPartId=18818163, Number of Contacts=10, Number of Pins=10, Number of Positions=10, Number of Rows=2, Orientation=Vertical, Packaging=Bulk, Pitch=2.54mm, REACH SVHC=Unknown, RoHS=Compliant, Row Spacing=2.54mm, Termination="Through Hole", Voltage Rating=250V, Width=12.7mm
P2: library part CMP-1502-00586-2, Color=Beige, Contact Resistance=20mΩ, Current Rating=3A, Flammability Rating="UL94 V-0", Insulation Resistance=1GΩ, Max Operating Temperature=105°C, Min Operating Temperature=-40°C, Operating Supply Voltage=250V, Connector Type="Male Pin", Contact Gender=Male, Contact Material=Copper, Contact Mating Length=7.493mm, Contact Plating=Tin, Fastening Type=Friction, Gender=Male, Height=3.3mm, Housing Material=Nylon, Insulation=Insulated, Lead Free="Lead Free", Lead Pitch=2.54mm, Length=10.16mm, Mount="Through Hole", NexarPartId=18818226, Number of Contacts=4, Number of Pins=4, Number of Positions=4, Number of Rows=1, Orientation=Vertical, Packaging=Bulk, Pitch=2.54mm, REACH SVHC=Unknown, RoHS=Compliant, Termination="Through Hole", Voltage Rating=250V, Width=10.2mm
Q1 Q2 Q3: "Bipolar (BJT) Transistor NPN 80 V 500 mA 100MHz 225 mW Surface Mount SOT-23-3 (TO-236)", Manufacturer_Name=onsemi, Manufacturer_Part_Number=SMMBTA06LT3G, Mouser Part Number=863-SMMBTA06LT3G, Datasheet Link=https://www.onsemi.com/pub/Collateral/MMBTA05LT1-D.PDF, Height=1.11mm, Mouser Price/Stock=https://www.mouser.co.uk/ProductDetail/onsemi/SMMBTA06LT3G?qs=uarJZ6H%252BeNrtzNKN%252B1EKYg%3D%3D
R1 R4 R7 R9 R10: library part DNP, "Thick Film Resistors - SMD D11/CRCW0603 0R0 ET2 e3", Arrow Part Number=CRCW06030000Z0EI, Manufacturer_Name=Vishay, Mouser Part Number=71-CRCW06030000Z0EI, Arrow Price/Stock=https://www.arrow.com/en/products/crcw06030000z0ei/vishay?utm_currency=USD&region=nac, Datasheet Link=http://www.vishay.com/docs/20035/dcrcwe3.pdf, Height=0.5mm, Manufacturer_Part_Number=CRCW06030000Z0EI, Mouser Price/Stock=https://www.mouser.co.uk/ProductDetail/Vishay-Dale/CRCW06030000Z0EI?qs=%252B6g0mu59x7L7KQG%252Bwwt0jQ%3D%3D
R2 R3 R6 R8 R11: library part 0R, "Thick Film Resistors - SMD D11/CRCW0603 0R0 ET2 e3", Arrow Part Number=CRCW06030000Z0EI, Manufacturer_Name=Vishay, Mouser Part Number=71-CRCW06030000Z0EI, Arrow Price/Stock=https://www.arrow.com/en/products/crcw06030000z0ei/vishay?utm_currency=USD&region=nac, Datasheet Link=http://www.vishay.com/docs/20035/dcrcwe3.pdf, Height=0.5mm, Manufacturer_Part_Number=CRCW06030000Z0EI, Mouser Price/Stock=https://www.mouser.co.uk/ProductDetail/Vishay-Dale/CRCW06030000Z0EI?qs=%252B6g0mu59x7L7KQG%252Bwwt0jQ%3D%3D
R5: library part 2k7Ohm, "2.7 kOhms ±1% 0.5W, 1/2W Chip Resistor 0805 (2012 Metric) Automotive AEC-Q200, Pulse Withstanding Thick Film", Arrow Part Number=CRCW08052K70FKEAHP, Manufacturer_Name=Vishay, Mouser Part Number=71-CRCW08052K70FKEAH, Arrow Price/Stock=https://www.arrow.com/en/products/crcw08052k70fkeahp/vishay?region=nac, Datasheet Link=https://componentsearchengine.com/Datasheets/1/CRCW08051R00FKEAHP.pdf, Height=0.6mm, Manufacturer_Part_Number=CRCW08052K70FKEAHP, Mouser Price/Stock=https://www.mouser.co.uk/ProductDetail/Vishay-Dale/CRCW08052K70FKEAHP?qs=40TFAHZMFvcOgTEige8g9Q%3D%3D
R12 R13 R16 R18 R19: library part 1kOhm, "1 kOhms ±0.1% 0.5W, 1/2W Chip Resistor 0603 (1608 Metric) Thin Film", Manufacturer_Name="TE Connectivity", Manufacturer_Part_Number=RA73F1J1K0BTDF, Mouser Part Number=279-RA73F1J1K0BTDF, Datasheet Link=https://www.te.com/commerce/DocumentDelivery/DDEController?Action=srchrtrv&DocNm=1773270-3&DocType=Data%20Sheet&DocLang=English&PartCntxt=2-2176474-6&DocFormat=pdf, Height=0.58mm, Mouser Price/Stock=https://www.mouser.co.uk/ProductDetail/TE-Connectivity-Holsworthy/RA73F1J1K0BTDF?qs=Li%252BoUPsLEnve%2FJ8%252BWostNg%3D%3D
R14 R17 R20: library part 4k7Ohm_0603, "4.7 kOhms ±1% 0.4W Chip Resistor 0603 (1608 Metric) Automotive AEC-Q200, Pulse Withstanding Thick Film", Manufacturer_Name="ROHM Semiconductor", Manufacturer_Part_Number=SDR03EZPF4701, Mouser Part Number=755-SDR03EZPF4701, Height=0.55mm, Mouser Price/Stock=https://www.mouser.co.uk/ProductDetail/ROHM-Semiconductor/SDR03EZPF4701?qs=byeeYqUIh0OpNXtQCyPv7A%3D%3D
R15: "SMD 0603 470ohm 1% Anti Surge AEC-Q200", Arrow Part Number=ESR03EZPF4700, Manufacturer_Name="ROHM Semiconductor", Mouser Part Number=755-ESR03EZPF4700, Arrow Price/Stock=https://www.arrow.com/en/products/esr03ezpf4700/rohm-semiconductor?region=nac, Datasheet Link=https://componentsearchengine.com/Datasheets/2/ESR03EZPF4700.pdf, Height=0.55mm, Manufacturer_Part_Number=ESR03EZPF4700, Mouser Price/Stock=https://www.mouser.co.uk/ProductDetail/ROHM-Semiconductor/ESR03EZPF4700?qs=DyUWGjl%252BcVsZQGp8SgvEfA%3D%3D
R21 R22 R27 R28: library part 4k7Ohm_0805, "4.7 kOhms ±1% 0.5W, 1/2W Chip Resistor 0805 (2012 Metric) Automotive AEC-Q200, Pulse Withstanding Thick Film", Arrow Part Number=CRCW08054K70FKEAHP, Manufacturer_Name=Vishay, Mouser Part Number=71-CRCW08054K70FKEAH, Arrow Price/Stock=https://www.arrow.com/en/products/crcw08054k70fkeahp/vishay?utm_currency=USD&region=nac, Datasheet Link=https://componentsearchengine.com/Datasheets/1/CRCW08051R00FKEAHP.pdf, Height=0.6mm, Manufacturer_Part_Number=CRCW08054K70FKEAHP, Mouser Price/Stock=https://www.mouser.co.uk/ProductDetail/Vishay-Dale/CRCW08054K70FKEAHP?qs=k2%2FDWSARqgEa%252B2IrxOkJMA%3D%3D
R23 R24 R25 R26: library part 2.2Ohm, "2.2 Ohms ±1% 0.5W, 1/2W Chip Resistor 0805 (2012 Metric) Automotive AEC-Q200, Pulse Withstanding Thick Film", Arrow Part Number=CRCW08052R20FKEAHP, Manufacturer_Name=Vishay, Mouser Part Number=71-CRCW08052R20FKEAH, Arrow Price/Stock=https://www.arrow.com/en/products/crcw08052r20fkeahp/vishay?utm_currency=USD&region=nac, Datasheet Link=https://componentsearchengine.com/Datasheets/1/CRCW08051R00FKEAHP.pdf, Height=0.6mm, Manufacturer_Part_Number=CRCW08052R20FKEAHP, Mouser Price/Stock=https://www.mouser.co.uk/ProductDetail/Vishay-Dale/CRCW08052R20FKEAHP?qs=40TFAHZMFvc8altFjF5kRw%3D%3D
SW1: library part CMP-1684-00021-1, "Tact Switch, SPST-NO, 0.05 A, -35 to 85 degC, 4-Pin THD, RoHS, Bulk", Actuator Color=Black, Contact Rating @ Voltage=0.05A@24VDC, Dielectric Strength=500VAC, Manufacturer="TE Connectivity", Maximum AC Voltage Rating=N/A, Maximum Contact Resistance=100mOhm, Maximum DC Voltage Rating=24V, Minimum Insulation Resistance=100MOhm, Operating Temperature=-35to85C, Package Description="4-Pin Through Hole Device, Body 5.99 x 5.99 mm, Pitch 6.5 mm", Package Reference=THD, Part No=1825910-6, Actuator Length=1.4mm, Actuator Material=PolybutyleneTerephthalate, Actuator Style=RoundButton, Base Material=N/A, Body Orientation=Straight, Bushing Type=Unthreaded, Contact Material=CopperAlloy, Contact Plating=Silver, Datasheet URL=http://www.te.com/commerce/DocumentDelivery/DDEController?Action=showdoc&DocId=Customer+Drawing%7F1825910%7FC9%7Fpdf%7FEnglish%7FENG_CD_1825910_C9.pdf%7F1825910-6, Datasheet Version="Rev. C9", Dimension=5.99x5mm, Electrical Life=100000Cycles, Family=1825910, Function=MomentaryContact, Housing Material=N/A, Illumination=N/R, Manufacturer URL=http://www.te.com, Mechanical Life=100000Cycles, Mounting=ThroughHole, Packaging=N/A, Pole Throw Configuration=SPST, Product Weight=N/A, RoHS=Yes, Seal Description=N/A, Seal Location=N/A, Switch Configuration=OFF(ON), Terminal Type=PCPins, Thread Size=N/R
Y1: "27.12 MHz ±10ppm Crystal 10pF 50 Ohms 4-SMD, No Lead", Arrow Part Number=7M-27.120MEEQ-T, Manufacturer_Name="TXC CORPORATION", Mouser Part Number=717-7M-27.120MEEQ-T, Arrow Price/Stock=https://www.arrow.com/en/products/7m-27.120meeq-t/txc-corporation?region=europe, Datasheet Link=http://www.txccrystal.com/images/pdf/7m-accuracy.pdf, Height=0.8mm, Manufacturer_Part_Number=7M-27.120MEEQ-T, Mouser Price/Stock=https://www.mouser.co.uk/ProductDetail/TXC-Corporation/7M-27.120MEEQ-T?qs=65dIHZNch5vpCedHjSv71Q%3D%3D

## Free pads (board coordinates)
  round 1.524 hole 3.5 unplated: 7(3.5,3.5) 7(3.5,58) 7(36.9,58.8)
  round 2 smd: 8(4.7,26.1) 8(4.7,31.1) 8(4.7,44)
  round 2 smd far side: 8(26.6,19.8)

## Via types
v1: diameter 0.6, hole 0.3, Top Layer to Bottom Layer, 43 vias
v2: diameter 1.27, hole 0.711, Top Layer to Bottom Layer, 8 vias
v3: diameter 0.45, hole 0.25, Top Layer to Bottom Layer, 2 vias

## Nets (pads, with @x,y where several pads share a name; then routed paths per layer and width w, separated by ;. In a path a pad name is that pad's centre, name@x,y a point inside that pad or via, vN(x,y) a via of type N, cw(c..) or ccw(c..) an arc to the next point about the centre after c; other vN are vias at no path point)
+3V3: J1.1 P2.3 pad.8@4.7,31.1 R6.1 R10.2 R12.1 R15.1 R18.1 | length 106.2
  Top Layer w0.45: pad.8@4.7,31.1 9.256,31.1 9.756,31.6 ; R18.1 9.7,25.65 9.7,6.1 13,2.8 27.5,2.8 29.2,4.5 29.2,12.05 ; R18.1@9.756,25.7 9.756,31.6 ; R12.1 27.3,12.05 29.2,12.05 ; R6.1 30.9,14.6 30.4,14.1 J1.1 30.39,12.05 29.2,12.05 ; R15.1 31.825,52.275 31.825,51.603 32.227,51.201 32.227,50.309 31.595,49.677 20.279,49.677 16.5,45.898 R10.2 15.7,38.3 13.44,36.04 P2.3 10.94,36.04 9.756,34.856 9.756,31.6
+3V3REG: P2.2 R9.2 | length 6.6
  Top Layer w0.45: P2.2 14,33.5 14.5,34 14.5,36 15,36.5 R9.2
+5: J1.3 J2.1 P2.1 pad.8@4.7,26.1 | length 48.2
  Top Layer w0.5: pad.8@4.7,26.1 6.8,26.1 v1(8,27.3)
  Bottom Layer w0.5: v1(8,27.3) 11.8,27.3 v1(15,30.5)
  Bottom Layer w0.6: J2.1 17.5,8.6 19.14,6.96 J1.3
ANT1: C18.1 IC1.23 | length 17.9
  Top Layer w0.3: IC1.23 33.4,32.7 38.7,38 47.79,38 C18.1
ANT2: C33.1 IC1.24 | length 26.7
  Top Layer w0.3: IC1.24 32.9,33.1 34.6,34.8 34.742,34.8 v1(34.742,34.858) ; v1(41.1,23.2) C33.1
  Bottom Layer w0.3: v1(34.742,34.858) 34.8,34.8 34.9,34.9 36.4,34.9 37.723,33.577 37.723,28.073 37.723,27.861 38.1,27.484 38.1,25.816 38.1,25.5 38.9,24.7 40.4,23.2 v1(41.1,23.2)
AUX1: IC1.40 P1.8 R4.1 | length 39.5
  Top Layer w0.3: P1.8 13.22,16.6 15.1,16.6 17.3,18.8 23.607,18.8 28.227,23.42 28.227,23.427 28.454,23.654 28.454,24.1 ; v1(29.2,24.023) 29.143,24.08 28.597,24.08 28.578,24.1 28.454,24.1 ; IC1.40 28.6,26.3 28.454,26.154 28.454,24.1 ; v1(38.8,19.1) 39.4,19.7 R4.1
  Bottom Layer w0.3: v1(29.2,24.023) 32.079,24.023 32.229,24.173 35.027,24.173 35.7,23.5 35.7,19.8 36.4,19.1 v1(38.8,19.1)
AUX2: IC1.2 J3.1 P1.6 | length 40.7
  Top Layer w0.3: P1.6@12.1,13.1 13.1,14.1 14.9,14.1 18.4,17.6 24.4,17.6 30.4,23.6 IC1.2
  Top Layer w0.45: P1.6 10.3,11.14 10.3,6.4 11.6,5.1 J3.1
AVDD: C13.2 IC1.28 R8.2 | length 9.2
  Top Layer w0.36: IC1.28 30.9,34 33.257,36.357 C13.2 34.777,37.591 34.777,38.817 R8.2
BUSY: IC1.8 P1.2 R13.2 | length 36.2
  Top Layer w0.26: P1.2 13.24,9 ; 15.7,9.002 15.7,10.5 20.3,15.1 25.9,15.1 33.4,22.6 IC1.8
  Top Layer w0.27: 13.24,9 13.242,9 15.1,9 ; 15.102,9.002 15.7,9.002 16.002,9.002 16.1,9.002 ; 16.1,9 20.45,9 R13.2
CLK1: IC1.36 R1.1 R3.2 | length 4.2
  Top Layer w0.3: R3.2 25.3,28.8 R1.1 27.5,28.8 28,28.3 IC1.36
CLK2: IC1.37 R2.2 | length 2.7
  Top Layer w0.3: R2.2 27.4,27.2 28,27.8 IC1.37
DVDD: C17.2 IC1.30 R11.2 | length 21.4
  Top Layer w0.36: IC1.30 29.9,33.8 28.499,35.201 28.499,40.26 R11.2 29.07,40.88 28.3,41.65 28.3,42.2 33,46.9 33.7,46.9 C17.2
GPO1: IC1.38 P1.10 | length 22.7
  Top Layer w0.3: P1.10@11.9,18 11.97,18.07 13.6,19.7 23.286,19.7 27.6,24.014 27.6,26.6 28.3,27.3 IC1.38
IRQ: IC1.39 P1.9 R19.2 | length 28.5
  Top Layer w0.3: R19.2 11.9,20.8 10.958,19.858 10.958,17.524 11.604,16.878 12.694,16.878 12.716,16.9 12.8,16.9 13.88,17.98 P1.9 15.893,19.273 23.463,19.273 28.027,23.837 28.027,26.331 28.423,26.727 28.427,26.727 28.5,26.8 IC1.39
MCU_CLK: R1.2
MISO: IC1.5 P1.4 | length 27.2
  Top Layer w0.26: P1.4 13.3,11.6 14.953,11.6 19.653,16.3 19.74,16.387 24.487,16.387 31.9,23.8 IC1.5
MOSI: IC1.3 P1.5 | length 22.8
  Top Layer w0.26: P1.5 18.8,17.1 24.5,17.1 30.9,23.5 IC1.3
MVDD: J3.2 P1.1 | length 7.6
  Top Layer w0.45: P1.1 15.993,6.427 19.773,6.427 J3.2
N.C_1: IC1.11
N.C_1*: C16.1 IC1.14 R7.1 R9.1 R10.1 | length 39.3
  Top Layer w0.3: R10.1 18,36.7 17.8,36.5 R9.1 18.15,36.6 v1(20,36.6) ; R7.1 v1(21.9,36.5) ; IC1.14 37.117,27.8 37.7,27.217 37.7,25.6 ; v1(36.9,25.6) 37.7,25.6 ; C16.1 37.7,22.875 37.7,25.6
  Bottom Layer w0.3: v1(20,36.6) 20.1,36.5 v1(21.9,36.5) 23.1,35.3 25.1,35.3 25.6,34.8 25.6,32.8 34.8,32.8 36.3,31.3 36.3,26.2 v1(36.9,25.6)
N.C_2: IC1.20
N.C_2*: IC1.31
N.C_3: IC1.32
N.C_4: IC1.33
N.C_5: IC1.34
N.C_6: IC1.35
NetC1_1: C1.1 R2.1 Y1.3 | length 3.7
  Top Layer w0.3: Y1.3 23.85,25.05 24.25,25.45 C1.1 25.85,25.45 26.1,25.7 R2.1
NetC2_2: C2.2 R3.1 Y1.1 | length 5.7
  Top Layer w0.3: C2.2@19.6,27.05 20.65,27.05 20.85,27.25 Y1.1 21.65,28.55 21.95,28.85 R3.1
NetC9_1: C9.1 C11.2 J2.2 L1.1 | length 22.2
  Top Layer w0.45: J2.2 19.1,33.6 ; C9.1 20.6,41.45 19.825,40.675 C11.2 20.9,39.325 20.9,35.4 19.1,33.6 ; L1.1@21.85,30.2 L1.1 20.85,30.05 20,30.9 20,32.7 19.1,33.6
NetC18_2: C18.2 C20.2 C21.2 C23.2 C24.2 R21.1 R23.1 R24.1 | length 14.5
  Top Layer w0.4: C21.2 49.5,31.88 C20.2 C20.2@49.65,33.8 ; C18.2 49.65,37.76 R21.1 C20.2@49.65,33.8 ; R24.1 R23.1 54.9,33.7 54.41,33.21 C24.2 C23.2 50.99,33.21 50.4,33.8 C20.2@49.65,33.8
NetC19_2: C19.2 R21.2 R22.2 | length 5.3
  Top Layer w0.4: C19.2 43.81,36.31 44.15,36.65 R22.2 46.15,36.65 46.9,35.9 R21.2
NetC20_1: C20.1 C21.1 C22.2 C25.2 L2.2 R22.1 | length 12.1
  Top Layer w0.4: L2.2 C22.2@41.69,33.1 ; C22.2@41.39,33.1 41.5,33.21 45.19,33.21 C25.2 ; R22.1 C25.2 ; C21.1 47.8,33.7 C20.1 46.8,33.8 46.1,33.1 45.3,33.1 C25.2
NetC26_1: C26.1 C28.1 C30.1 C31.1 L3.2 R27.2 | length 12
  Top Layer w0.4: L3.2 41.59,27.6 C28.1@41.7,27.49 ; C28.1@41.5,27.49 41.5,27.59 C28.1 C26.1 ; R27.2 C26.1 ; C30.1 47.79,27.09 C31.1 46.7,27 46.11,27.59 C26.1
NetC27_1: C27.1 C29.1 C30.2 C31.2 C33.2 R25.1 R26.1 R28.1 | length 14.1
  Top Layer w0.4: C33.2 49.41,24.96 R28.1 49.5,25.15 C31.2 ; C30.2 49.41,27.09 C31.2 ; R25.1 R26.1 54.8,27.1 54.31,27.59 C29.1 C27.1 50.79,27.59 50.2,27 C31.2
NetC32_2: C32.2 R27.1 R28.2 | length 5.4
  Top Layer w0.4: C32.2 43.79,24.49 44.23,24.05 R27.1 45.95,24.05 47,25.1 R28.2
NetLED1_1: LED1.1 Q1.3 | length 5.9
  Top Layer w0.27: Q1.3 25.456,9.345 25.735,9.066 25.735,6.333 26.269,5.8 LED1.1
NetLED1_2: LED1.2 R12.2 | length 2
  Top Layer w0.27: LED1.2 27.285,8.9 27.285,10.85 R12.2
NetLED2_1: LED2.1 Q2.3 | length 3.5
  Top Layer w0.3: Q2.3 34.7,49.8 34.95,49.55 LED2.1 LED2.1@36.15,49.8
NetLED2_2: LED2.2 R15.2 | length 3.4
  Top Layer w0.3: R15.2 35.875,52.5 36.325,52.05 LED2.2
NetLED3_1: LED3.1 Q3.3
NetLED3_2: LED3.2 R18.2 | length 2.2
  Top Layer w0.3: R18.2@11.125,25.7 R18.2 13,25.7 LED3.2
NetQ1_1: Q1.1 R13.1 R14.2 | length 3.8
  Top Layer w0.27: R14.2 20.55,10.4 R13.1 22.35,10.35 Q1.1
NetQ2_1: Q2.1 R16.1 R17.2 | length 5.6
  Top Layer w0.3: R16.1 27.65,52.2 29.2,50.65 R17.2 29.352,50.703 31.198,50.703 Q2.1
NetQ3_1: Q3.1 R19.1 R20.2 | length 3.6
  Top Layer w0.3: R19.1 R19.1@14.1,20.95 ; R20.2 14.15,21 R19.1@14.1,20.95 ; Q3.1 R19.1@14.1,20.95
NetR23_2: R23.2 R24.2 R25.2 R26.2 | length 516.3
  Top Layer w0.4: R26.2 R25.2 59.4,29.1 ; R23.2 R24.2 57.35,31.6 59.257,31.6 ; 60.394,-0.894 ccw(c61.2,-0.894) 61.2,-1.7 123.6,-1.7 ccw(c123.6,-0.3) 125,-0.3 v3(125,29.8) ; 60.4,32.4 60.4,61.6 cw(c61.7,61.6) 61.7,62.9 124,62.9 cw(c124,62.176) 124.512,62.688 cw(c123.644,61.646) 125,61.646 125,30.7 124.4,30.1 124.4,-0.3 cw(c123.6,-0.3) 123.6,-1.1 61.548,-1.1 ; 61,-0.658 61,61.5 cw(c61.8,61.5) 61.8,62.3 123.6,62.3 cw(c123.6,61.5) 124.4,61.5 v3(124.4,31)
  Top Layer w0.406: 59.257,31.6 ccw(c59.429,32.571) 60.4,32.4 ; 59.4,29.1 cw(c59.35,28.05) 60.4,28 60.4,-0.9 ; 61,-0.658 ccw(c61.495,-0.605) 61.548,-1.1
  Bottom Layer w0.4: v3(124.4,31) 124.4,30.7 125,30.1 v3(125,29.8)
NSS: IC1.1 P1.7 | length 20.6
  Top Layer w0.3: P1.7 15.14,15.44 17.8,18.1 24.296,18.1 29.9,23.704 IC1.1
PVDD: C10.2 IC1.6 pad.8@26.6,19.8 R6.2 | length 17.8
  Top Layer w0.4: R6.2 29.4,16.4 29.839,16.839 30.639,16.839 C10.2 31.214,18.9 30.8,18.9 v1(30.2,18.3) ; v1(31.1,22) 32.4,23.3 IC1.6
  Bottom Layer w0.4: pad.8@26.6,19.8 29.6,19.8 ; v1(30.2,18.3) 29.6,18.9 29.6,19.8 ; v1(31.1,22) 29.6,20.5 29.6,19.8
PVSS: C1.2 C2.1 C3.2 C4.1 C5.1 C6.1 C7.1 C8.1 C9.2 C10.1 C11.1 C12.1 C13.1 C14.1 C15.1 C16.2 C17.1 C22.1 C23.1 C24.1 C25.1 C26.2 C27.2 C28.2 C29.2 IC1.4 IC1.9 IC1.19 IC1.27 IC1.41 P2.4 pad.8@4.7,44 Q1.2 Q2.2 Q3.2 R14.1 R17.1 R20.1 SW1.3 Y1.2 Y1.4 | length 135.1
  Top Layer w0.27: 33.9,24.8 IC1.9 IC1.41@33.9,26.6
  Top Layer w0.3: C2.1 19.7,25.3 20.6,25.3 20.85,25.05 Y1.2 ; Y1.2@21.75,25.05 Y1.2 ; R14.1@22.25,12.101 R14.1 22.25,13.15 22.7,13.6 v2(24.8,13.6) ; C1.2 Y1.4 21.65,25.55 Y1.2 ; IC1.19 36,30.3
  Top Layer w0.4: C12.1 26.675,36.8 C14.1 ; C15.1 30.964,42.964 32.3,44.3 33.2,44.3 35.5,42 36.086,42 C17.1 ; C3.2 38.1,39.1 38.1,42.5 C17.1 ; v2(38.7,45.8) 38.8,45.7 38.8,44.7 37.357,43.257 C17.1
  Top Layer w0.45: v2(10,38.6) 10.01,38.59 12.39,38.59 P2.4 12.4,41.4 13.15,42.15 SW1.3 ; v1(12,23.8) 12.45,23.35 R20.1 ; Q3.2 19.45,20.95 v1(20.6,22.1) 21.65,23.15 Y1.2 ; C8.1 17.975,53.5 20.1,53.5 v2(21,52.6) ; R14.1@22.25,12.101 23.018,12.101 23.449,11.669 23.449,8.619 23.221,8.39 Q1.2 ; C11.1 ccw(c23.016,40.641) 23.016,40.3 v2(25,40.3) 26.8,38.5 C14.1@26.8,37.186 ; C9.2 C9.2@26.4,47.1 ; v2(28.7,45.2) 28.7,45.7 27.3,47.1 C9.2@26.4,47.1 ; v2(30.2,35.9) 30.224,35.924 30.224,37.21 C13.1 ; Q2.2 29.405,48.845 R17.1 28.15,48.95 26.975,47.775 26.975,47.675 C9.2@26.4,47.1 ; 33.9,24.8 33.9,23.6 34.6,22.9 34.6,20.9 34.043,20.343 C10.1 ; v2@35.1,3.1 v2(34.9,2.9) 36.1,2.9 36.875,3.675 C5.1 36.9,5.925 36.9,7.1 37.4,7.6 37.4,9.68 C4.1 37.38,11.42 36.875,11.925 C6.1 36.875,14.225 36.5,14.6 34.5,14.6 34.2,14.9 34.2,15.7 34.125,15.775 C7.1 34.125,17.025 35.8,18.7 37.3,18.7 37.5,18.9 C16.2
  Top Layer w0.5: 36,30.3 v1(41.7,30.3) ; C28.2@41.7,29.11 C28.2 v1(41.7,30.3) ; C22.1 v1(41.7,30.3) ; C26.2 v1(45.2,30.3) ; C25.1 v1(45.2,30.3) ; C27.2 v1(51.4,30.3) ; C23.1 v1(51.4,30.3) ; C29.2 v1(53.4,30.3) ; C24.1 v1(53.4,30.3) ; v1(41.7,30.3) v1(45.2,30.3) ; v1(45.2,30.3) v1(51.4,30.3) ; v1(51.4,30.3) v1(53.4,30.3)
  other v1: 30.5,26.9 31.5,26.9 32.8,26.9 33.8,26.9 30.5,27.9 31.5,27.9 32.8,27.9 33.8,27.9 30.5,29.2 31.5,29.2 32.8,29.2 33.8,29.2 30.5,30.2 31.5,30.2 32.8,30.2 33.8,30.2
RESET: R5.1 R16.2 | length 14.2
  Top Layer w0.3: R5.1 12.863,51.9 13.94,50.823 23.548,50.823 24.925,52.2 R16.2
RESET_N: C8.2 IC1.10 R5.2 SW1.2 | length 56
  Top Layer w0.3: SW1.2 R5.2 10.897,51.9 11.073,52.076 11.073,52.74 11.235,52.902 12.465,52.902 13.467,51.9 C8.2 ; IC1.10 34.4,25.5 34.8,25.5 v1(35.3,25)
  Bottom Layer w0.3: SW1.2 15.7,42.9 17.8,42.9 18.8,41.9 18.8,25.3 19.5,24.6 34.9,24.6 v1(35.3,25)
RXN: C32.1 IC1.15 | length 8.7
  Top Layer w0.27: IC1.15 37.2,28.3 39.39,26.11 C32.1
RXP: C19.1 IC1.16 R4.2 | length 21.3
  Top Layer w0.27: IC1.16 37.7,28.8 v1(38.6,27.9)
  Top Layer w0.3: v1(38.6,34.2) 39.09,34.69 C19.1 ; v1(39.1,25.5) 39.4,25.2 R4.2
  Bottom Layer w0.3: v1(38.6,34.2) 38.15,33.75 38.15,28.25 38.5,27.9 v1(38.6,27.9) 38.8,27.7 38.8,25.8 v1(39.1,25.5)
SCK: IC1.7 P1.3 | length 26.2
  Top Layer w0.26: P1.3 20.04,15.8 25.8,15.8 32.9,22.9 IC1.7
TVDD: C12.2 C14.2 IC1.22 L1.2 R7.2 | length 11
  Top Layer w0.3: IC1.22 33.9,32.2 34.102,32.402 34.1,32.404 34.104,32.404
  Top Layer w0.45: C14.2@26.675,33.6 C14.2 28.575,33.725 v1(28.9,33.4) ; 34.104,32.404 v1(35.1,33.4)
  Bottom Layer w0.45: v1(28.9,33.4) v1(35.1,33.4)
TX1: IC1.21 L2.1 | length 6.1
  Top Layer w0.3: IC1.21 34.4,31.8 34.8,32.2 38.5,32.2 39.2,31.5 L2.1@39.7,31.5
TX2: IC1.18 L3.1 | length 5.1
  Top Layer w0.27: IC1.18 35.776,29.8 35.788,29.788 38.112,29.788 38.5,29.4 39.5,29.4 L3.1@39.7,29.2 ; L3.1 L3.1@40.05,29.05
V_MID: C7.2 IC1.17 | length 19.9
  Top Layer w0.27: IC1.17 37.9,29.3 38.4,28.8 38.7,28.8 38.769,28.869 v1(38.8,28.838) ; C7.2 37.9,16.1 40.5,18.7 v1(40.5,24.8)
  Bottom Layer w0.27: v1(38.8,28.838) 39.138,28.5 40.1,28.5 40.5,28.1 v1(40.5,24.8)
VBAT_1: C4.2 C5.2 C6.2 IC1.12 IC1.13 IC1.26 J1.2 | length 45.2
  Top Layer w0.3: J1.2 33.26,9.5 C4.2@33.44,9.68 ; IC1.26 31.9,33.9 v1(32.2,34.2) ; C4.2@33.35,9.68 C4.2@33.44,9.68 ; C5.2@33.9,6.2 33.9,7.1 33.46,7.54 33.46,9.66 C4.2@33.44,9.68 ; IC1.12 36.1,26.8 ; IC1.13 36.1,27.3 36.1,26.8 ; v1(36.9,26.8) 36.1,26.8 ; C4.2@33.44,9.68 C4.2 33.444,9.724 33.444,11.744 33.925,12.225 C6.2 32.7,13.3 32.2,13.8 32.2,16.2 33.5,17.5 36.1,20.1 36.1,22.584 36.1,26.8
  Bottom Layer w0.3: v1(32.2,34.2) 36.496,34.2 36.9,33.796 v1(36.9,26.8)
VDD: C15.2 IC1.29 R8.1 R11.1 | length 16.2
  Top Layer w0.36: IC1.29 30.4,34.2 29.2,35.4 29.2,38.839 30.077,39.717 R11.1 30.861,40.5 31.5,40.5 32.7,39.3 33.2,39.3 33.426,39.526 33.717,39.526 33.717,39.877 R8.1 C15.2
VDHF: C3.1 IC1.25 | length 6.8
  Top Layer w0.27: IC1.25 32.4,33.6 C3.1@35.705,36.905
pads on no net: SW1.1 SW1.4

## Polygon pours and split planes (outlines as drawn)
PVSS on Top Layer "PVSS_L01_P007" (solid, remove dead copper, pour order 7): 1.5,8.5 1.5,53.4 cw(c8.65,53.35) 8.7,60.5 38.6,60.6 cw(c38.55,59.25) 39.9,59.2 39.9,1.8 cw(c39.1,1.7) 39.2,0.9 9.1,0.9 cw(c9.1,8.5)
TVDD on Top Layer "TVDD_L01_P000" (solid, pour order 0): 20.9,31.1 20.9,34.2 27.7,34.2 27.8,34.1 27.8,33.1 27.6,32.9 24,32.9 23.9,32.8 23.9,31.4 23.6,31.1 22.8,31.1
+5 on Top Layer "+5_L01_P002" (solid, pour order 2): 10.6,32.3 10.6,29.1 19.1,29.1 19.1,32.3
NetLED3_1 on Top Layer "NETLED3_1_L01_P001" (solid, pour order 1): 14.1,27.4 14.1,24.1 15.7,22.5 17.8,22.5 17.8,27.4
PVSS on Bottom Layer "PVSS_L02_P008" (solid, remove dead copper, pour order 8): 1.5,8.5 1.5,53.4 cw(c8.65,53.35) 8.7,60.5 38.6,60.6 cw(c38.55,59.25) 39.9,59.2 39.9,1.8 cw(c39.1,1.7) 39.2,0.9 9.1,0.9 cw(c9.1,8.5)

## Silkscreen, mask and mechanical layers (free items; w line width, h text height)
Top Overlay:
  lines w0.254: 10.1,47.3 10.1,45.5 11.2,45.5 12.2,44.5 ; 12.6,45.5 14.1,45.5 ; 14.2,43.6 14.2,45.5
  lines w0.4: 65,30.4 120.9,30.4 ; 93.1,2.9 93.1,60.5
  text "RESET" at 34.354,55.254 h1
  text "HF Antenna" at 67.5,48 h2
  text "13.56 MHz" at 68.9,42.8 h2
  text "PVSS_TP" at 1.554,41.521 h1
  text "GND" at 6.054,37.254 h1
  text "+3V3" at 4.954,35.354 h1
  text "3.3R" at 5.154,33.654 h1
  text "+5" at 6.754,31.654 h1
  text "3V3_TP" at 2.154,28.821 h1
  text "IRQ" at 12.954,27.254 h1
  text "5V_TP" at 2.354,23.721 h1
  text "(Simulated Values)" at 100.554,22.054 h1
  text "MVDD" at 5.554,19.454 h1
  text "BUSY" at 5.654,17.854 h1
  text "65 x 65 Antenna" at 100.654,17.854 h1
  text "SCK" at 6.554,16.254 h1
  text "T" at 100.597,15.739 h1
  text "r" at 103.11,15.739 h1
  text "n" at 103.864,15.739 h1
  text "-" at 106.628,15.733 h1
  text "2" at 107.884,15.739 h1
  text "u" at 101.853,15.705 h1
  text "s" at 105.12,15.705 h1
  text "MISO" at 5.854,14.854 h1
  text "=" at 102.607,13.507 h1
  text "MOSI" at 5.854,13.354 h1
  text "L" at 100.597,13.226 h1
  text "1" at 106.879,13.226 h1
  text "n" at 108.136,13.226 h1
  text "H" at 109.141,13.226 h1
  text "8" at 104.366,13.195 h1
  text "9" at 105.623,13.189 h1
  text "AUX2" at 5.554,11.854 h1
  text "=" at 102.607,10.994 h1
  text "2" at 104.366,10.713 h1
  text "F" at 108.638,10.713 h1
  text "C" at 100.597,10.673 h1
  text "." at 105.623,10.679 h1
  text "3" at 106.125,10.682 h1
  text "p" at 107.382,10.481 h1
  text "NSS" at 6.554,10.354 h1
  text "AUX1" at 5.954,8.854 h1
  text "=" at 102.607,8.481 h1
  text "R" at 100.597,8.2 h1
  text "1" at 104.366,8.2 h1
  text "1" at 106.125,8.2 h1
  text "h" at 110.9,8.2 h1
  text "m" at 112.157,8.2 h1
  text "." at 105.623,8.166 h1
  text "8" at 107.382,8.169 h1
  text "O" at 109.141,8.16 h1
  text "IRQ" at 6.654,7.354 h1
  text "GPO1" at 5.954,5.754 h1
  text "BUSY" at 25.754,3.154 h1